# EAGLE board schematic-PCBdone (EAGLE 8.4.0)
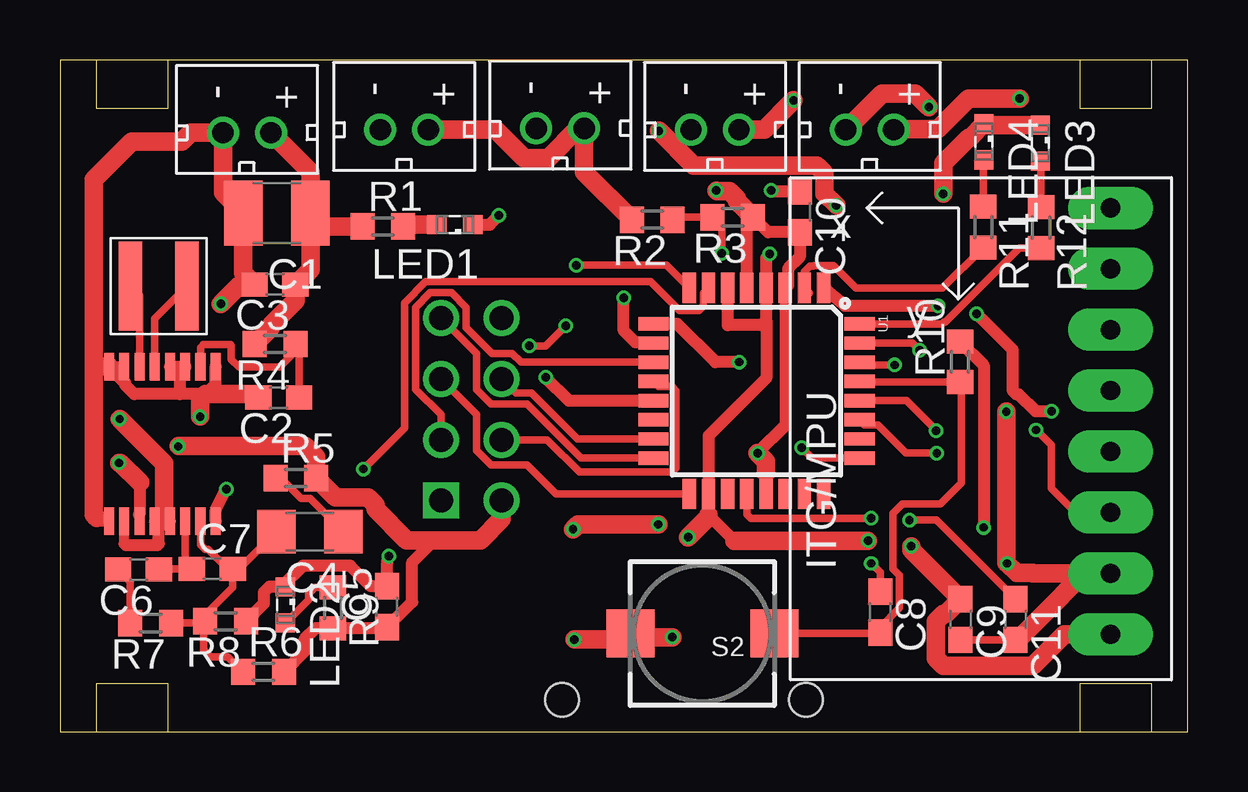
[diagram p0: board, top side]
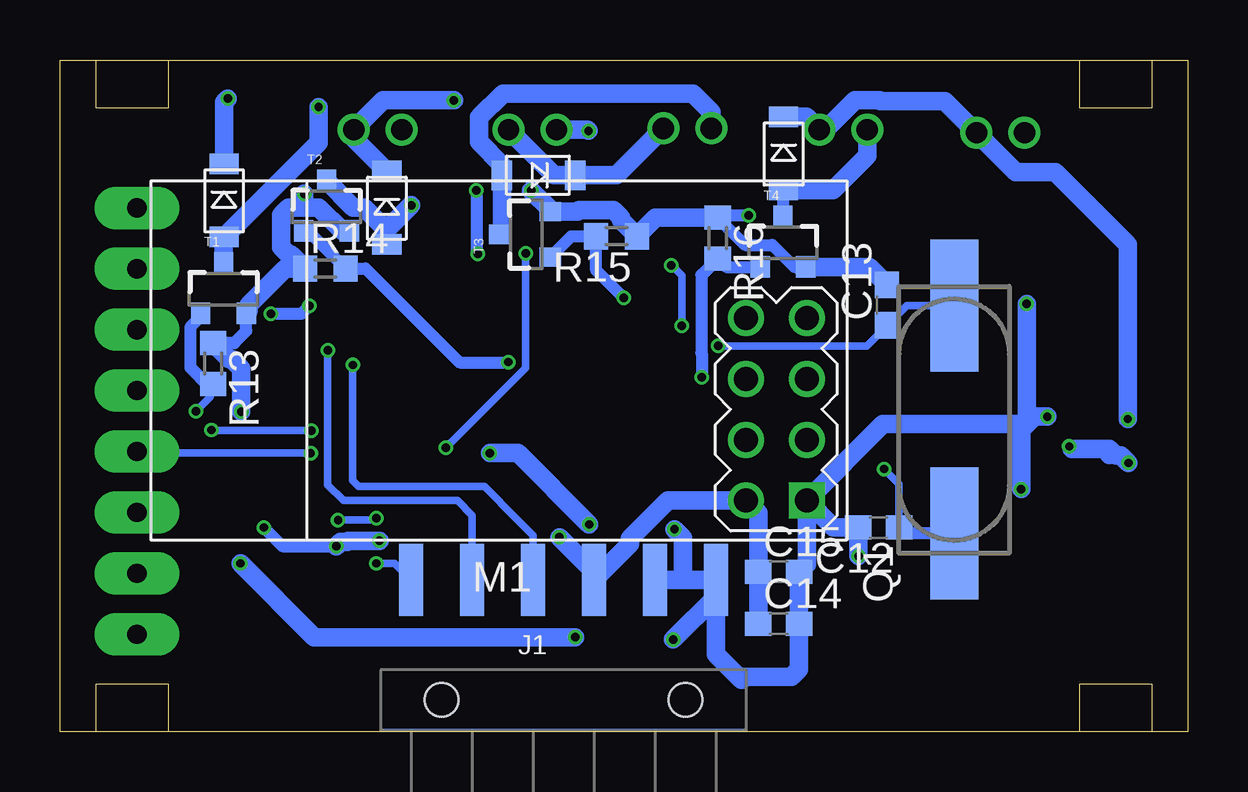
[diagram p1: board, bottom side, seen from below]

Size 47 x 28 mm. Coordinates in mm from the lower left corner, seen from the top.
Outline: 0,0 47,0 47,28 0,28 0,0
Copper layers (1*16): Top 0.035559375mm / dielectric 1.6mm / Bottom 0.035559375mm
Design rules "oshpark-2layer": minimum track width 6mil, minimum drill 10mil, track to track 6mil, track to pad 6mil, pad to pad 6mil, via to via 6mil, smd to smd 6mil, copper to edge 15mil, drill to drill 6mil, minimum pad ring 5mil, minimum via ring 5mil, stop-mask expansion 2.5mil, vias tented up to drill 0mil, thermal gap 10mil

## Footprints (pad centres in the part's own frame; a part is rotated, then mirrored left to right if it is on the bottom)
C1210 = smd 1.6 x 2.7: 1 -1.4,0; 2 1.4,0
C0603 = smd 1.1 x 1: 1 -0.85,0; 2 0.85,0
C1206 = smd 1.6 x 1.8: 1 -1.4,0; 2 1.4,0
MINI2-F3-B = smd 1.22 x 0.85: NEG 0,1.55; POS 0,-1.5
FTDI_DEVICE_RA_SMT = smd 1 x 3: 1 -6.35,5; 2 -3.81,5; 3 -1.27,5; 4 1.27,5; 5 3.81,5; 6 6.35,5 | hole 1.4: -5.08,0; 5.08,0
XAL4020 = smd 0.98 x 3.7: 1 -1.185,0; 2 1.185,0
SML0603 = smd 0.8 x 0.8: A 0.75,0; C -0.75,0
WIRELESS-NRF24L01 = drill 1 square: 1 -12.7,6.35 | drill 1: 2 -10.16,6.35; 3 -12.7,3.81; 4 -10.16,3.81; 5 -12.7,1.27; 6 -10.16,1.27; 7 -12.7,-1.27; 8 -10.16,-1.27
CSM-7X-DU = smd 5.5 x 2: 1 -4.75,0; 2 4.75,0
R0603 = smd 1 x 1.1: 1 -0.85,0; 2 0.85,0
PUSHBUTTON_SMD_SJ = smd 2 x 2: P$1 3,0; P$2 -3,0
SOT23-3 = smd 0.8 x 0.9: 1 -0.95,-1; 2 0.95,-1; 3 0,1.1
TQFP32-08 = smd 1.27 x 0.559: 1 -4.293,2.8; 2 -4.293,2; 3 -4.293,1.2; 4 -4.293,0.4; 5 -4.293,-0.4; 6 -4.293,-1.2; 7 -4.293,-2; 8 -4.293,-2.8; 17 4.293,-2.8; 18 4.293,-2; 19 4.293,-1.2; 20 4.293,-0.4; 21 4.293,0.4; 22 4.293,1.2; 23 4.293,2; 24 4.293,2.8 | smd 0.559 x 1.27: 9 -2.8,-4.293; 10 -2,-4.293; 11 -1.2,-4.293; 12 -0.4,-4.293; 13 0.4,-4.293; 14 1.2,-4.293; 15 2,-4.293; 16 2.8,-4.293; 25 2.8,4.293; 26 2,4.293; 27 1.2,4.293; 28 0.4,4.293; 29 -0.4,4.293; 30 -1.2,4.293; 31 -2,4.293; 32 -2.8,4.293
GY-521 = drill 0.8 pad 1.778 long: ADO -8.89,-6.35; GND -8.89,6.35; INT -8.89,-8.89; SCL -8.89,3.81; SDA -8.89,1.27; VCC -8.89,8.89; XCL -8.89,-3.81; XDA -8.89,-1.27
SSOP-16GN = smd 0.419 x 1.143: 1 -2.223,-3.226; 2 -1.587,-3.226; 3 -0.953,-3.226; 4 -0.318,-3.226; 5 0.318,-3.226; 6 0.953,-3.226; 7 1.587,-3.226; 8 2.223,-3.226; 9 2.223,3.226; 10 1.587,3.226; 11 0.953,3.226; 12 0.318,3.226; 13 -0.318,3.226; 14 -0.953,3.226; 15 -1.587,3.226; 16 -2.223,3.226
JST_CONNECTOR_FEMALE = drill 0.889: + 0,1; - 0,-1

## Placement (x,y rotation side)
C1  100uF  [C1210]  9.04,21.62 180 top
C2  0.056uF  [C0603]  9.12,13.92 180 top
C3  10uF  [C0603]  8.97,18.64 180 top
C4  65pF  [C1206]  10.41,8.33 180 top
C5  22uF  [C0603]  13.64,5.21 90 top
C6  470pF  [C0603]  3.28,6.76 180 top
C7  10pF  [C0603]  6.35,6.78 0 top
C8  0.1uF  [C0603]  34.19,4.98 270 top
C9  0.1uF  [C0603]  37.54,4.67 270 top
C10  0.1uF  [C0603]  30.84,21.67 270 top
C11  0.1uF  [C0603]  39.83,4.67 270 top
C12  27pF  [C0603]  12.88,8.51 180 bottom
C13  27pF  [C0603]  12.52,17.78 90 bottom
C14  10uF  [C0603]  17.04,4.5 0 bottom
C15  0.1uF  [C0603]  17.04,6.65 0 bottom
D1  DB2W40300L  [MINI2-F3-B]  40.16,22.12 0 bottom
D2  DB2W40300L  [MINI2-F3-B]  33.38,21.82 0 bottom
D3  DB2W40300L  [MINI2-F3-B]  27.08,23.19 270 bottom
D4  DB2W40300L  [MINI2-F3-B]  16.84,24.08 0 bottom
J1  FTDI_DEVICERA_SMT  [FTDI_DEVICE_RA_SMT]  26.01,1.32 0 bottom
L1  3.3uH  [XAL4020]  4.11,18.57 180 top
LED1  RED  [SML0603]  16.46,21.13 180 top
LED2  RED  [SML0603]  9.4,5.28 270 top
LED3  YELLOW  [SML0603]  40.87,24.54 270 top
LED4  YELLOW  [SML0603]  38.51,24.59 270 top
M1  WIRELESS-NRF24L01  [WIRELESS-NRF24L01]  28.57,15.98 180 bottom
Q1  8MHz  [CSM-7X-DU]  9.73,13 90 bottom
R1  820  [R0603]  13.46,21.06 0 top
R2  10K  [R0603]  24.69,21.34 180 top
R3  10K  [R0603]  28.04,21.44 180 top
R4  200K  [R0603]  8.97,16.15 180 top
R5  10K  [R0603]  9.83,10.57 0 top
R6  374K  [R0603]  8.48,2.49 0 top
R7  15K  [R0603]  3.78,4.52 180 top
R8  162K  [R0603]  6.91,4.6 180 top
R9  820  [R0603]  11.38,5.16 270 top
R10  10K  [R0603]  37.52,15.42 90 top
R11  820  [R0603]  38.48,21.03 270 top
R12  820  [R0603]  40.89,21.01 270 top
R13  10K  [R0603]  40.61,15.34 270 bottom
R14  10K  [R0603]  35.94,19.3 0 bottom
R15  10K  [R0603]  23.8,20.65 180 bottom
R16  10K  [R0603]  19.58,20.57 270 bottom
S2  PUSH_BUTTON  [PUSHBUTTON_SMD_SJ]  26.77,4.09 180 top
T1  NMOS  [SOT23-3]  40.18,18.44 0 bottom
T2  NMOS  [SOT23-3]  35.89,21.87 0 bottom
T3  NMOS  [SOT23-3]  27.56,20.73 90 bottom
T4  NMOS  [SOT23-3]  16.87,20.37 0 bottom
U1  ATMEGA328P_TQFP  [TQFP32-08]  29.03,14.2 270 top
U2  GY-521MPU6050  [GY-521]  34.9,12.94 180 top
U3  LTC3534  [SSOP-16GN]  4.27,11.99 180 top
U$1  JST_CONNECTOR_FEMALE  [JST_CONNECTOR_FEMALE]  7.8,24.97 270 top
U$4  JST_CONNECTOR_FEMALE  [JST_CONNECTOR_FEMALE]  33.76,25.1 270 top
U$7  JST_CONNECTOR_FEMALE  [JST_CONNECTOR_FEMALE]  27.3,25.1 270 top
U$10  JST_CONNECTOR_FEMALE  [JST_CONNECTOR_FEMALE]  20.85,25.15 270 top
U$13  JST_CONNECTOR_FEMALE  [JST_CONNECTOR_FEMALE]  14.35,25.1 270 top

## Library data of the parts
C1 C4 C8-C11 = rcl; SPICEPREFIX: C
C2 C3 C5-C7 C12-C15 R2-R8 R10 R13-R16 = resistor
D1-D4 M1 U2 U$1 U$4 U$7 U$10 U$13 = quad
J1 = quad; PROD_ID: CONN-08971
L1 = coilcraft
LED1-LED4 = led
Q1 = crystal; OC_FARNELL: unknown; OC_NEWARK: unknown
R1 R9 R11 R12 = rcl; SPICEPREFIX: R
S2 = adafruit
T1-T4 = quad; DATASHEET: http://www.mouser.com/ds/2/196/irlml6244pbf-936666.pdf; MOUSER: 942-IRLML6244TRPBF; URL: http://www.mouser.com/Search/ProductDetail.aspx?R=IRLML6244TRPBFvirtualkey57370000virtualkey942-IRLML6244TRPBF
U1 = quad; PROD_ID: IC-09069
U3 = LTC3534

## Nets
CE: M1.3 U1.11
CSN: M1.4 U1.12
DEBUG_LED1: R12.2 U1.32
DEBUG_LED2: R11.2 U1.2
DTR: C8.1 J1.1
GND: C1.2 C2.2 C3.2 C5.2 C9.2 C10.2 C11.2 C12.2 C13.2 C14.2 C15.2 J1.5 J1.6 LED1.C LED2.C LED3.C LED4.C M1.1 R3.1 R8.1 R13.1 R14.1 R15.1 R16.1 S2.P$1 T1.2 T2.2 T3.2 T4.2 U1.3 U1.5 U1.21 U2.GND U3.1 U3.3 U3.4 U3.7 U3.8 U3.9 U3.16 U$1.-
MISO: M1.7 U1.16
MOSI: M1.6 U1.15
N$1: C12.1 Q1.1 U1.7
N$2: C8.2 R10.1 S2.P$2 U1.29
N$3: D1.POS T1.3 U$4.-
N$4: C13.1 Q1.2 U1.8
N$5: D2.POS T2.3 U$7.-
N$6: D3.POS T3.3 U$10.-
N$7: D4.POS T4.3 U$13.-
N$8: L1.1 U3.5
N$9: L1.2 U3.6
N$10: LED1.A R1.2
N$11: LED2.A R9.1
N$12: LED3.A R12.1
N$13: LED4.A R11.1
N$14: C4.1 R5.1
N$16: C2.1 R4.1 U3.2
N$18: C4.2 C7.2 R6.1 R7.1 R8.2 U3.15
N$19: C6.1 C7.1 U3.14
N$20: C6.2 R7.2
N$25: C11.1 U1.20
PWM1: R13.2 T1.1 U1.1
PWM2: R14.2 T2.1 U1.9
PWM3: R15.2 T3.1 U1.10
PWM4: R16.2 T4.1 U1.13
PWR: C1.1 C3.1 D1.NEG D2.NEG D3.NEG D4.NEG R1.1 R2.2 R4.2 U3.10 U3.12 U3.13 U$1.+ U$4.+ U$7.+ U$10.+ U$13.+
RXD: J1.3 U1.30
SCK: M1.5 U1.17
SCL: U1.28 U2.SCL
SDA: U1.27 U2.SDA
TXD: J1.2 U1.31
V_BAT: R2.1 R3.2 U1.25
V_REG_OUT: C5.1 C9.1 C10.1 C14.1 C15.1 J1.4 M1.2 R5.2 R6.2 R9.2 R10.2 U1.4 U1.6 U1.18 U2.VCC U3.11

## Tracks (layer width: path | path; a pad name or v marks a point on that pad's centre or on a via)
CE
  Top 0.305: M1.3 15.88,13.21 14.82,14.27 14.82,17.68 15.44,18.3 16.31,18.3 16.93,17.68 16.93,16.83 18,15.77 18.85,15.77 19.22,15.4 U1.11
CSN
  Top 0.305: M1.4 20.31,12.17 21.66,10.81 25.5,10.81 25.68,10.99 25.68,14.2 25.5,14.38 24.95,14.38 U1.12
DEBUG_LED1
  Top 0.305: U1.32 36.77,17 36.84,17.07 36.91,17.07 39.99,20.16 R12.2
DEBUG_LED2
  Top 0.305: R11.2 36.79,18.49 33.18,18.49 32.24,19.43 31.43,19.43 31.4,19.41 31.27,19.41 31.03,19.17 U1.2 31.25,18.27
DTR  (via drill 0.35)
  Top 0.305: C8.1 34.19,6.63 v33.81,7.01
  Bottom 0.305: v33.81,7.01 33.05,7.01 J1.1
GND  (via drill 0.35)
  Top 0.305: 8.73,6.03 9.25,6.03 LED2.C | C9.2 C11.2
  Top 0.406: 1.52,8.91 1.68,8.76 U3.9 | U3.7 U3.8 | 1.68,15.21 1.47,15.21 1.4,15.29
  Top 0.508: 9.25,6.03 10.12,6.91 12.1,6.91 12.95,6.06 C5.2 13.64,7.04 v13.72,7.32 | LED2.C 8.73,6.03 8.5,5.8 8.5,5.33 R8.1 | U1.21 29.43,10.78 | U1.5 28.63,21.18 R3.1 29.51,20.82 C10.2 30.84,19.78 30.35,19.3 30.35,18.61 U1.3 30.23,12.76 v29.08,11.61 | LED1.C 17.91,21.13 v18.29,21.51 | U3.4 4.93,15.21 | 4.93,15.21 U3.3 | U3.1 6.47,15.2 6.47,14.47 6.07,14.07 5,14.07 | 5,14.07 5,15.14 4.93,15.21 | U3.8 2.7,14.56 2.7,14.47 3.1,14.07 5,14.07 | U3.16 6.49,9.23 v6.93,10.11
  Top 0.762: v21.44,3.83 23.52,3.83 S2.P$1 23.92,3.94 v25.53,3.94 | C11.2 39.93,3.82 40.86,4.75 40.86,4.77 42.69,6.59 U2.GND 40.56,6.59 40.55,6.61 39.88,6.61 v39.47,7.01 39.45,7.04 v39.45,13.34 | v21.39,8.43 21.59,8.64 v24.94,8.64 | v29.08,11.61 29.43,11.26 29.43,10.78 | LED3.C 38.56,25.29 LED4.C 37.94,24.77 37.88,24.77 36.82,23.71 v36.82,22.42 | v27.36,22.55 27.39,22.52 27.91,22.52 28.23,22.21 28.23,22.1 R3.1 | 1.52,8.91 1.4,9.04 1.4,15.29 1.4,23.01 2.99,24.6 5.08,24.6 5.44,24.97 U$1.- 6.8,22.46 C1.2 7.64,19.12 C3.2 7.52,18.64 v6.71,17.83 | U3.8 1.68,15.21 | C2.2 8.12,14.07 6.07,14.07 5.84,13.85 v5.84,13.13
  Bottom 0.508: R13.1 39.74,16.19 39.23,16.7 T1.2 | T4.2 16.39,19.37 17.3,20.28 18.44,20.28 R16.1 19.49,21.51 v18.29,21.51
  Bottom 0.762: v13.72,7.32 13.72,8.5 C12.2 14.76,8.51 M1.1 | M1.1 15.88,6.97 C15.2 C14.2 16.19,2.6 16.51,2.29 18.47,2.29 18.59,2.16 19.66,3.23 J1.6 | J1.5 21.03,6.32 | 21.03,6.32 J1.6 | v21.44,3.83 19.66,5.61 J1.6 | C13.2 13.26,19.37 T4.2 | 21.03,6.32 21.03,8.08 v21.39,8.43 | v24.94,8.64 27.91,11.61 v29.08,11.61 | T1.2 39.13,17.55 39.13,17.79 37.61,19.3 R14.1 37.37,19.89 37.46,19.89 37.77,20.2 37.77,21.54 37.46,21.85 36.83,21.85 | R16.1 22.18,21.42 R15.1 23.62,21.32 23.62,21.42 23.93,21.73 25.37,21.73 25.43,21.68 T3.2 26.56,21.76 v27.36,22.55 | T2.2 35.23,20.87 36.21,21.85 36.83,21.85 | v36.82,22.42 36.82,21.86 36.83,21.85 | v39.47,7.01 36.4,3.94 v25.53,3.94 | v6.93,10.11 6.93,12.59 6.71,12.81 | v6.71,17.83 6.71,12.81 | M1.1 12.69,12.81 6.71,12.81 | 6.71,12.81 6.39,13.13 v5.84,13.13 | R13.1 39.95,15.53 39.84,15.53 39.45,15.13 v39.45,13.34
MISO
  Top 0.305: U1.16 21.72,11.4 19.47,13.65 17.98,13.65 17.36,14.27 17.36,15.77 M1.7
MOSI
  Top 0.305: U1.15 21.57,12.2 19.66,14.11 19.02,14.11 M1.6
N$1  (via drill 0.35)
  Top 0.305: U1.7 26.82,18.27 26.82,17.73 26.64,17.55 25.83,17.55 24.61,18.76 15.25,18.76 14.36,17.88 14.36,12.66 v12.65,10.95
  Bottom 0.305: v12.65,10.95 12.03,10.33 C12.1
  Bottom 0.508: Q1.1 11.77,8.26 C12.1
N$2
  Top 0.305: S2.P$2 34.15,4.09 C8.2 34.19,4.35 34.99,5.15 34.99,6.5 34.73,6.77 34.73,9.1 35.12,9.5 36.7,9.5 37.57,10.36 37.57,14.52 R10.1 33.36,14.57 U1.29
N$3  (via drill 0.35)
  Top 0.762: v36.22,26.04 35.65,26.6 34.26,26.6 U$4.-
  Bottom 0.762: v36.22,26.04 36.22,24.56 D1.POS 40.18,20.6 T1.3
N$4  (via drill 0.35)
  Top 0.305: U1.8 25.28,19.45 v21.51,19.45 | v21.08,16.92 20.25,16.08 v19.56,16.08
  Bottom 0.305: Q1.2 11.7,17.75 C13.1 13.37,16.08 v19.56,16.08 | v21.51,19.45 21.08,19.01 v21.08,16.92
N$5  (via drill 0.35)
  Top 0.762: v32.36,21.95 31.87,22.44 31.87,23.29 31.56,23.6 26.41,23.6 v24.97,25.04
  Bottom 0.762: T2.3 34.77,21.85 34.32,21.85 33.38,20.91 D2.POS 33.38,20.93 v32.36,21.95 | U$7.- 25.02,25.09 v24.97,25.04
N$6
  Bottom 0.762: T3.3 28.58,20.81 D3.POS 28.58,23.62 29.54,24.59 29.54,25.61 28.54,26.6 20.62,26.6 19.85,25.83 U$10.-
N$7
  Bottom 0.508: T4.3 16.84,21.5 D4.POS
  Bottom 0.762: D4.POS 14.78,22.58 13.35,24.01 U$13.-
N$8
  Top 0.305: U3.5 3.95,17.22 L1.1
N$9
  Top 0.305: U3.6 3.31,18.18 L1.2
N$10
  Top 0.762: R1.2 14.39,21.13 LED1.A
N$11
  Top 0.305: LED2.A 10.36,5.5 10.36,5.74 10.63,6.01 R9.1
N$12
  Top 0.305: R12.1 40.89,23.76 LED3.A
N$13
  Top 0.305: R11.1 38.48,23.81 LED4.A
N$14
  Top 0.305: C4.1 10.43,9.71 10.05,9.71 9.2,10.57 R5.1
N$16
  Top 0.305: C2.1 9.97,16 | 9.97,16 R4.1 | U3.2 5.86,16.02 5.97,16.13 7.11,16.13 7.14,16.1 7.14,15.52 7.47,15.19 9.16,15.19 9.97,16
N$18
  Top 0.305: R7.1 5.98,4.52 | 5.98,4.52 R8.2 6.06,4.87 7.2,6.01 C7.2 7.2,6.84 | R6.1 7,3.12 6.27,3.12 5.98,3.42 5.98,4.52 | C4.2 7.52,6.84 7.2,6.84 | U3.15 5.86,7.79 6.05,7.59 6.18,7.59 6.92,6.84 7.2,6.84
N$19
  Top 0.305: C6.1 4.15,6.78 C7.1 5.22,7.06 U3.14
N$20
  Top 0.305: R7.2 2.94,6.25 C6.2
N$25  (via drill 0.35)
  Top 0.305: C11.1 36.54,8.81 v35.41,8.81 | v33.81,8.89 28.8,8.89 28.63,9.06 U1.20
  Bottom 0.305: v35.41,8.81 33.88,8.81 v33.81,8.89
PWM1  (via drill 0.35)
  Top 0.305: U1.1 32.03,18.49 | 36.58,17.75 v36.6,17.76
  Top 0.508: U1.1 32.71,17.75 36.58,17.75 | v38.22,17.41 39.7,15.93 39.7,14.22 39.85,14.07 39.95,14.07 40.67,13.36 v41.33,13.36
  Bottom 0.305: 40.82,14.41 R13.2 40.74,13.94 v41.33,13.36 | 41.13,17.28 T1.1
  Bottom 0.508: v36.6,17.76 36.95,17.41 v38.22,17.41 | T1.1 41.13,17.3 41.57,16.86 41.57,15.17 40.82,14.41
PWM2  (via drill 0.35)
  Top 0.508: v28.31,15.4 27.32,15.4 25.72,17 U1.9
  Bottom 0.305: 28.32,15.39 v28.31,15.4
  Bottom 0.508: T2.1 36.66,20.87 R14.2 34.27,19.3 30.35,15.39 28.32,15.39
PWM3  (via drill 0.35)
  Top 0.508: U1.10 24.42,16.16 23.98,16.24 23.5,16.72 v23.5,18.08
  Bottom 0.508: T3.1 25.68,20.65 R15.2 24.65,19.23 v23.5,18.08
PWM4  (via drill 0.35)
  Top 0.508: v20.24,14.77 21.21,13.8 U1.13
  Bottom 0.508: T4.1 19.23,19.37 R16.2 20.27,19.04 20.27,15.79 20.24,15.76 v20.24,14.77
PWR  (via drill 0.35)
  Top 0.406: 2.68,7.84 U3.10
  Top 0.508: 2.68,7.84 2.74,7.77 4.06,7.77 4.12,7.82 4.12,8.6 3.99,8.72 | 3.99,8.72 3.99,8.76 4.34,8.76 U3.13 | U3.12 3.99,8.72
  Top 0.762: 10.44,21.16 10.44,19.27 C3.1 9.82,17.96 8.78,16.93 8.78,16.82 R4.2 | 10.44,21.16 C1.1 10.44,23.32 U$1.+ | R2.2 21.85,23.32 U$10.+ 21.6,25.15 20.36,23.91 19.34,23.91 18.16,25.09 U$13.+ | v30.58,26.31 29.36,25.09 U$7.+ | R1.1 10.54,21.06 10.44,21.16 | v40.01,26.39 37.87,26.39 36.6,25.12 34.78,25.12 U$4.+ | 4.34,8.76 4.34,11.18 v2.49,13.03
  Bottom 0.762: U$7.+ 26.4,23.19 D3.NEG 23.81,23.19 U$10.+ | D4.NEG 15.88,25.63 U$13.+ 15.09,25.09 13.86,26.33 12.84,26.33 12.8,26.29 10.12,26.29 U$1.+ 7.15,23.32 5.51,23.32 2.49,20.3 v2.49,13.03 | D2.NEG 34.76,24.75 U$4.+ 33.52,26.33 32.25,26.33 32.23,26.31 v30.58,26.31 | D1.NEG 40.16,26.24 v40.01,26.39
RXD  (via drill 0.35)
  Top 0.305: U1.30 33.44,15.28 v34.79,15.28
  Bottom 0.305: v34.79,15.28 34.79,10.46 34.75,10.41 34.54,10.21 29.31,10.21 27.96,8.87 27.93,8.83 27.28,8.18 J1.3
SCK
  Top 0.305: U1.17 20.68,9.91 19.47,11.11 17.98,11.11 17.36,11.73 17.36,13.22 M1.5
SCL  (via drill 0.35)
  Top 0.305: U1.28 35.27,13.8 v36.52,12.55 | v40.69,12.57 41.33,11.94 41.33,10.13 42.33,9.13 U2.SCL
  Bottom 0.305: v36.52,12.55 40.66,12.55 v40.69,12.57
SDA  (via drill 0.35)
  Top 0.305: U1.27 33.54,12.78 34.09,12.78 35.26,11.61 v36.55,11.61
  Bottom 0.305: v36.55,11.61 43.72,11.61 U2.SDA
TXD  (via drill 0.35)
  Top 0.305: v35.84,15.9 35.54,16.2 U1.31
  Bottom 0.305: J1.2 29.82,9.02 30.43,9.63 35.18,9.63 35.84,10.29 v35.84,15.9
V_BAT  (via drill 0.35)
  Top 0.305: U1.25 31.35,11.4 v30.91,11.84 | v27.58,19.94 27.58,21.05 R3.2 25.64,21.44 R2.1
  Bottom 0.305: v30.91,11.84 27.58,15.16 v27.58,19.94
V_REG_OUT  (via drill 0.35)
  Top 0.305: 10.66,4.31 11.25,4.31 R9.2 | U3.11 3.31,9.06
  Top 0.508: R5.2 11.61,9.64 12.78,9.64 | 14.44,7.98 15.6,7.98 | 17.53,7.98 15.6,7.98 | 15.6,7.98 14.68,7.06 14.68,5.4 C5.1 13.59,4.31 11.25,4.31 | 4.95,11.91 v4.93,11.89 | R9.2 10.66,4.31 10.19,3.83 10.19,3.34 R6.2 | U1.6 27.83,16.94 29.23,16.94 29.44,17.14 | 29.44,17.14 29.43,17.15 U1.4 29.43,19.75 v29.59,19.91 | R10.2 38.51,15.28 v38.51,8.51 | 29.44,17.14 29.44,14.73 27.03,12.33 U1.18 27.03,9.04 28.12,7.95 | C10.1 29.68,22.52 v29.64,22.55 | 3.33,10.38 3.31,10.36 3.31,9.06 3.3,9.04
  Top 0.762: M1.2 18.41,8.87 17.53,7.98 14.44,7.98 13.15,9.27 13.15,9.45 12.84,9.77 11.48,9.77 R5.2 10.68,11.44 10.21,11.91 4.95,11.91 | 3.33,10.38 2.52,11.2 v2.46,11.2 | U2.VCC 41.86,4.05 40.55,2.74 36.82,2.74 36.51,3.05 36.51,4.59 36.82,4.91 36.92,4.91 C9.1 35.48,7.58 v35.48,7.72 | 28.12,7.95 v33.68,7.95 | 27.03,9.04 27.03,8.95 v26.19,8.1
  Bottom 0.508: 2.72,11.41 v2.46,11.2 | v4.93,11.89 4.82,11.78 | v38.51,8.51 37.72,7.72 v35.48,7.72 | v29.64,22.55 29.64,19.96 v29.59,19.91
  Bottom 0.762: C14.1 C15.1 17.89,9.11 M1.2 21.65,9.63 23.23,8.04 23.23,7.83 J1.4 | 4.82,11.78 3.26,11.78 | 3.26,11.54 3.26,11.78 | v2.46,11.2 2.77,11.51 3,11.51 3.26,11.78 | v35.48,7.72 35.3,7.9 35.03,7.9 34.98,7.95 v33.68,7.95 | J1.4 24.74,6.75 | v26.19,8.1 24.74,6.66 J1.4